# Altium PCB PCB.PcbDoc
Units mil, origin at the board's own origin, x right, y up, seen from the top; angles counter-clockwise.
Board outline 2500 x 2500 mil, 4 copper layers (Top Layer, GNDL, PWRL, Bottom Layer), stack 62.797 mil thick; 20 components, 37 nets, 134 pads, 145 vias.
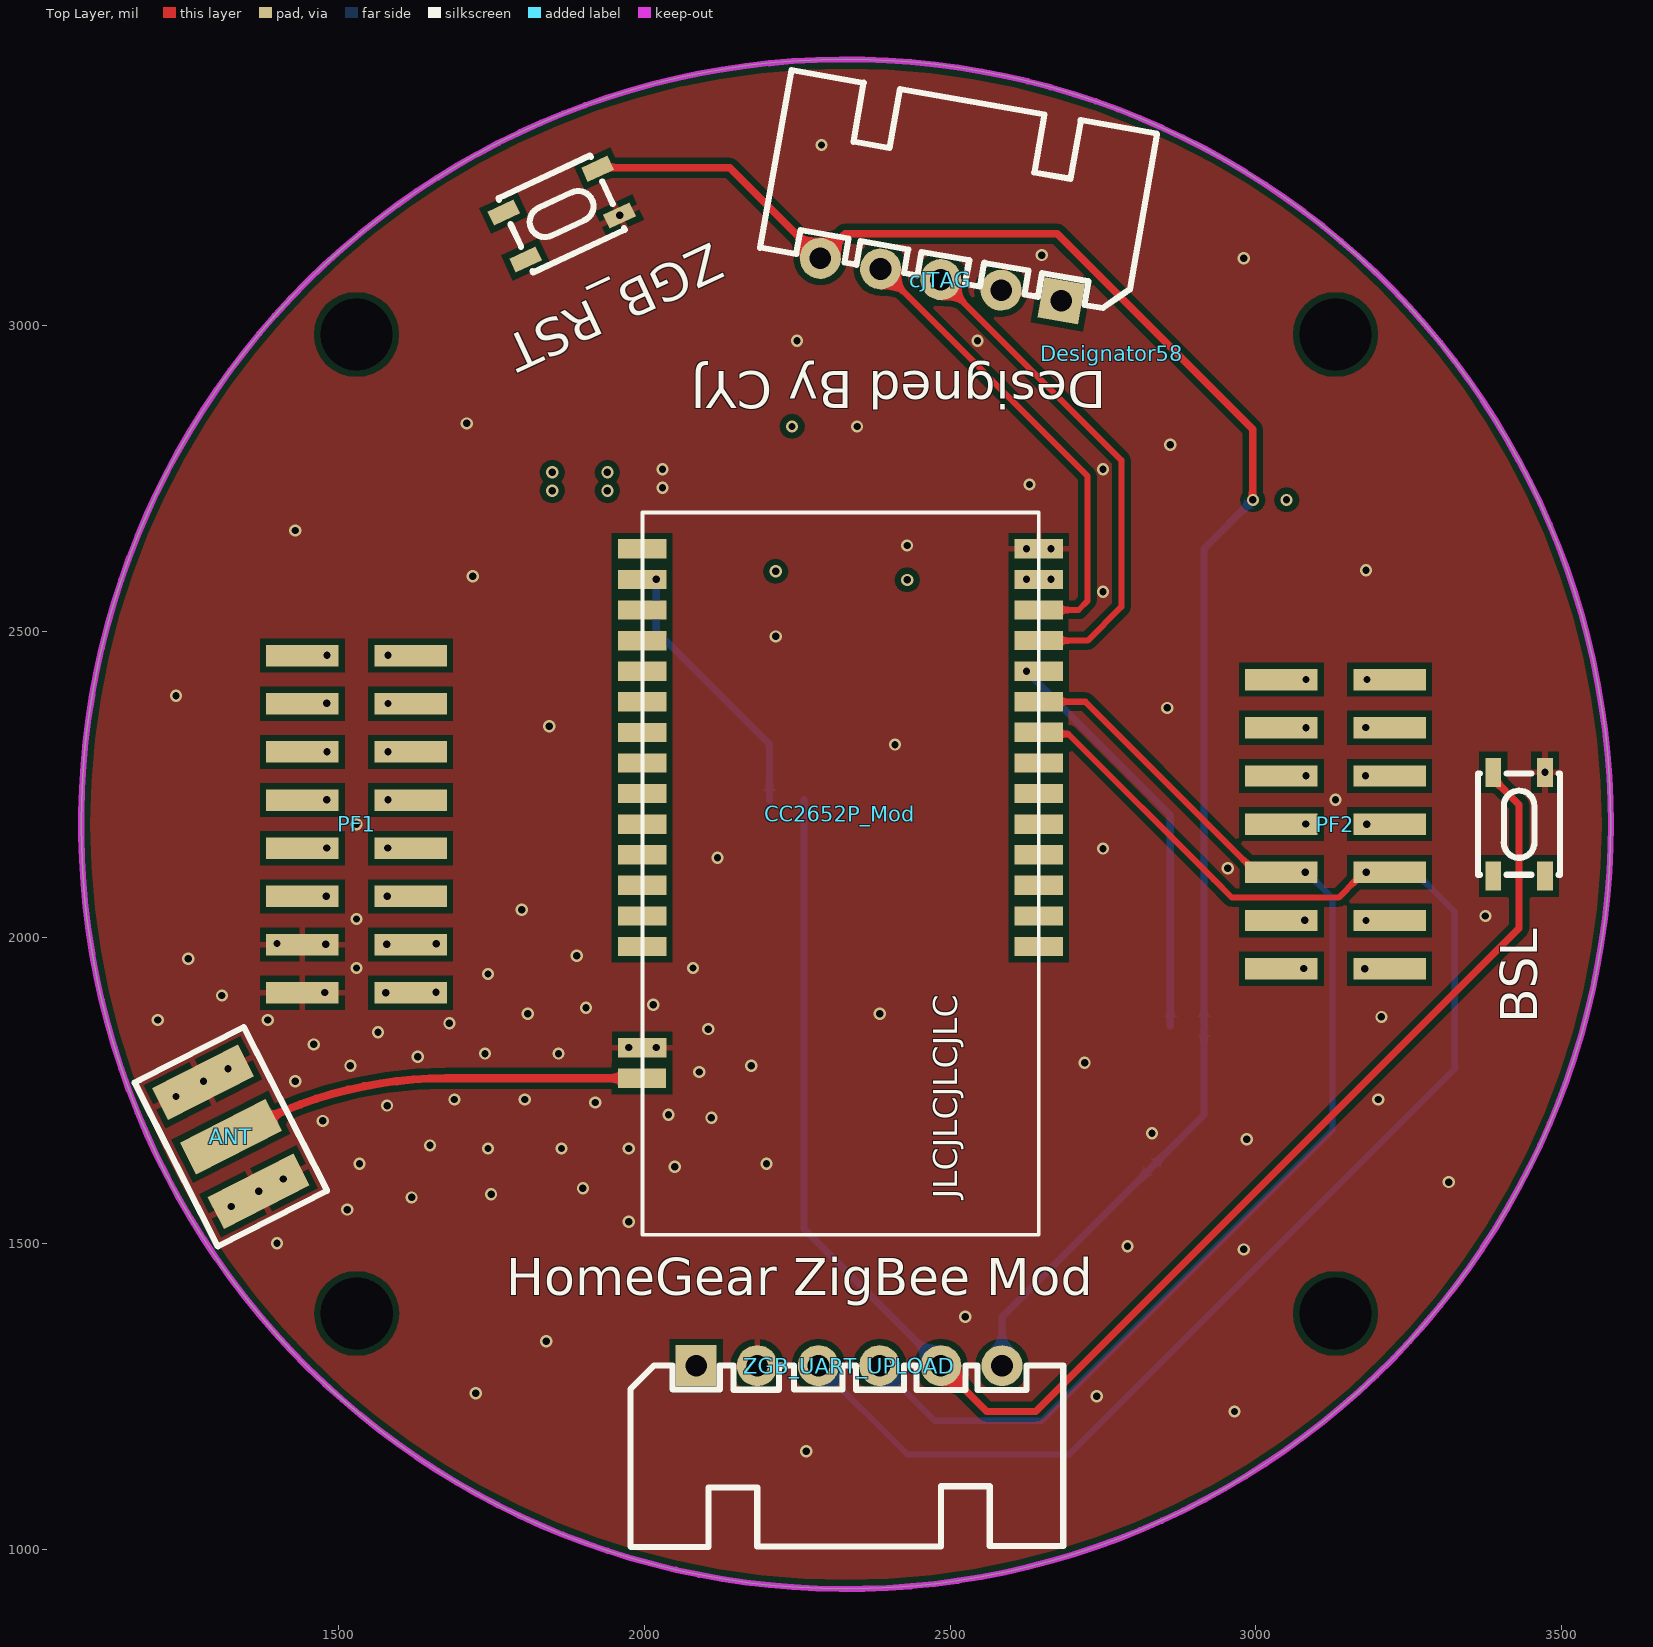
[diagram p0: Top Layer view]
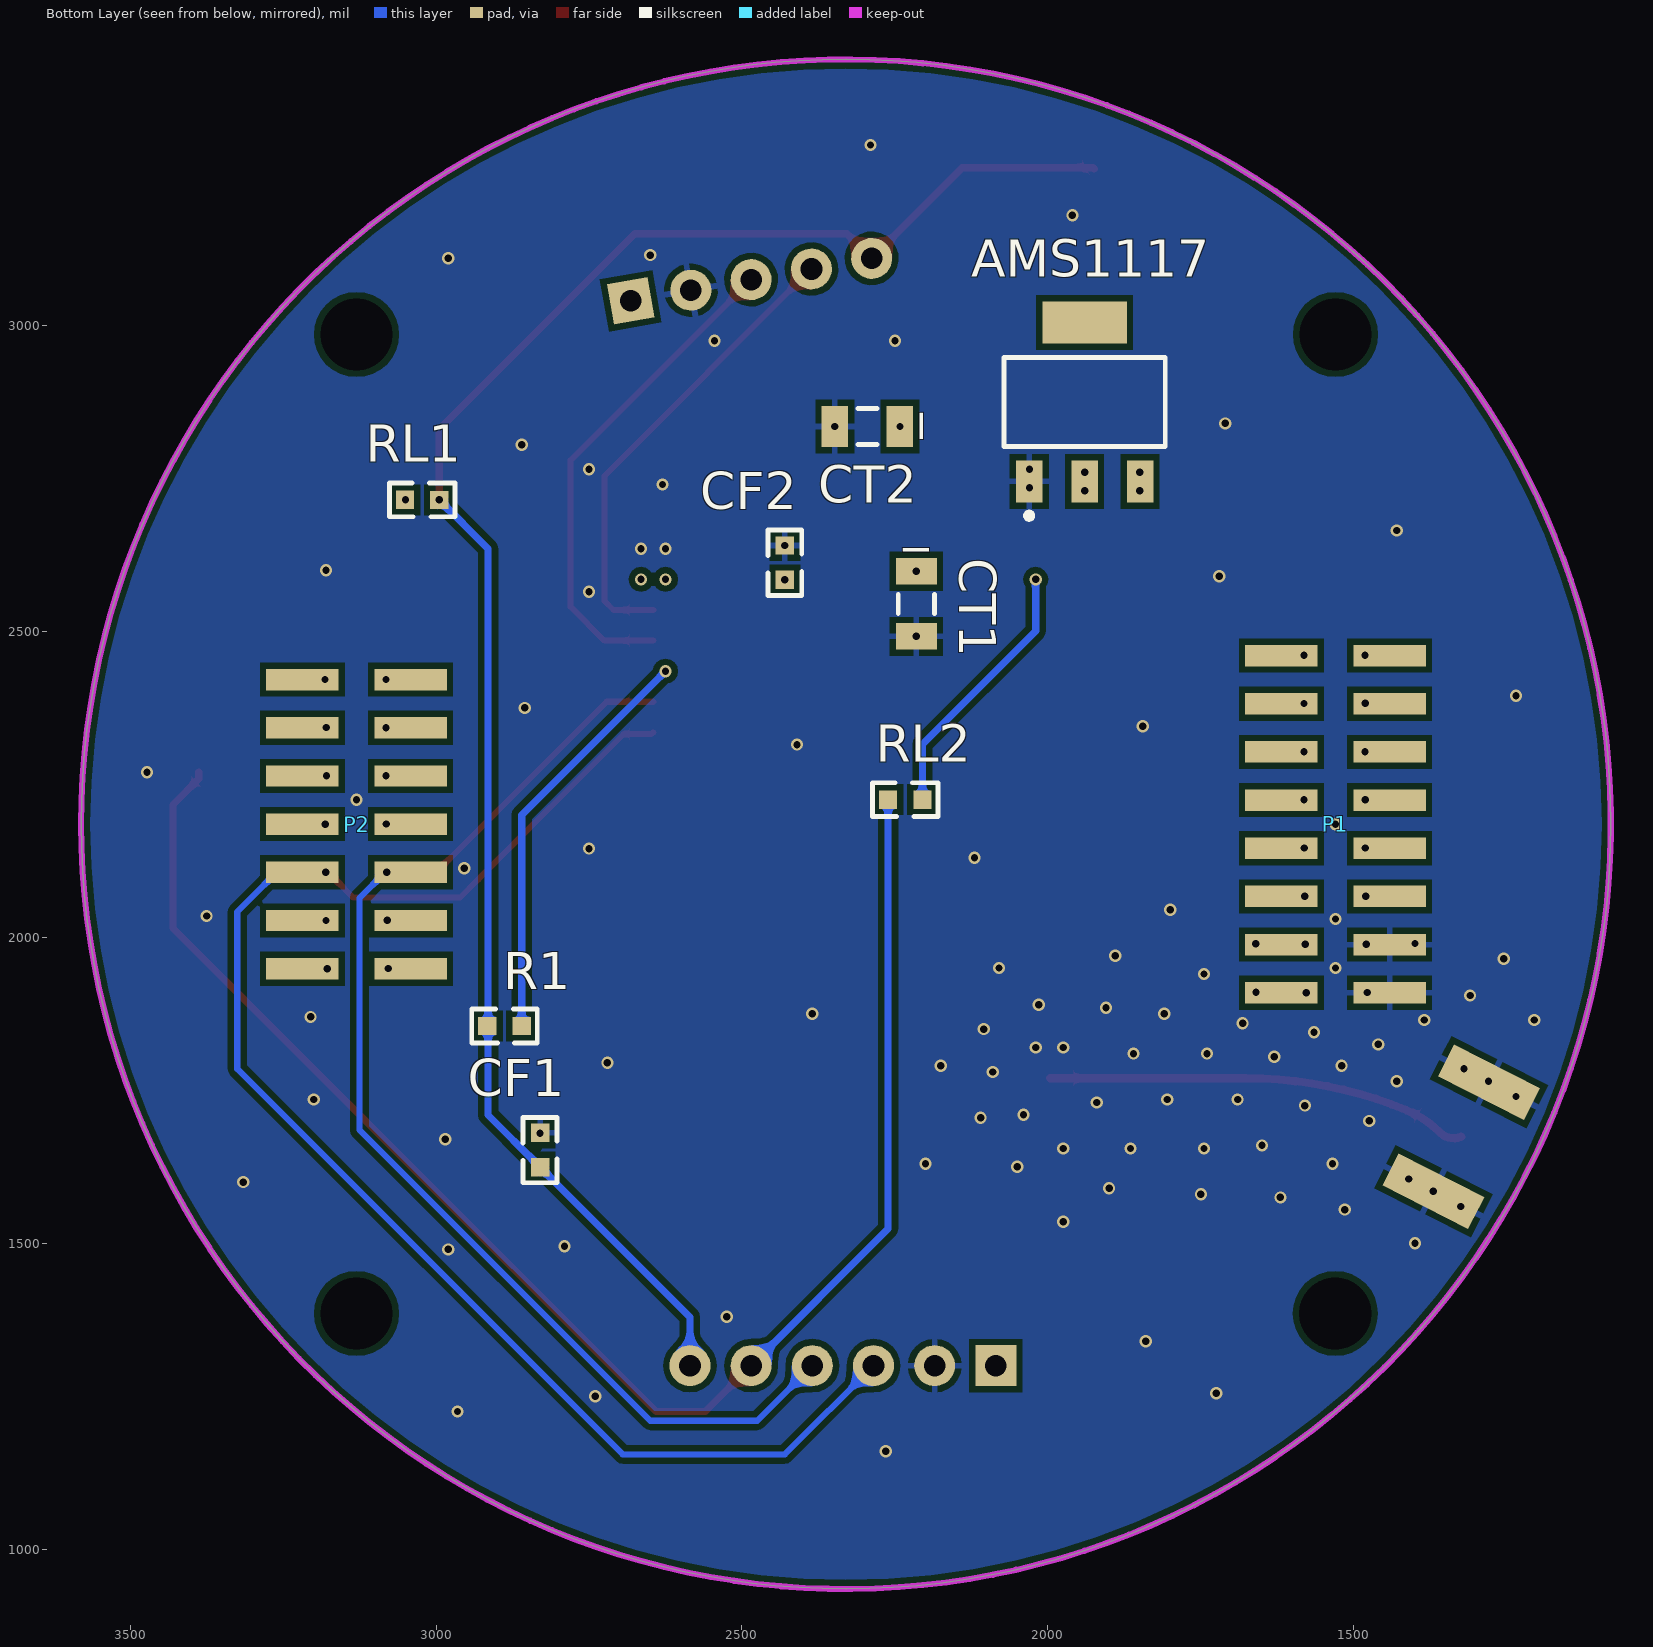
[diagram p1: Bottom Layer view, seen from below]
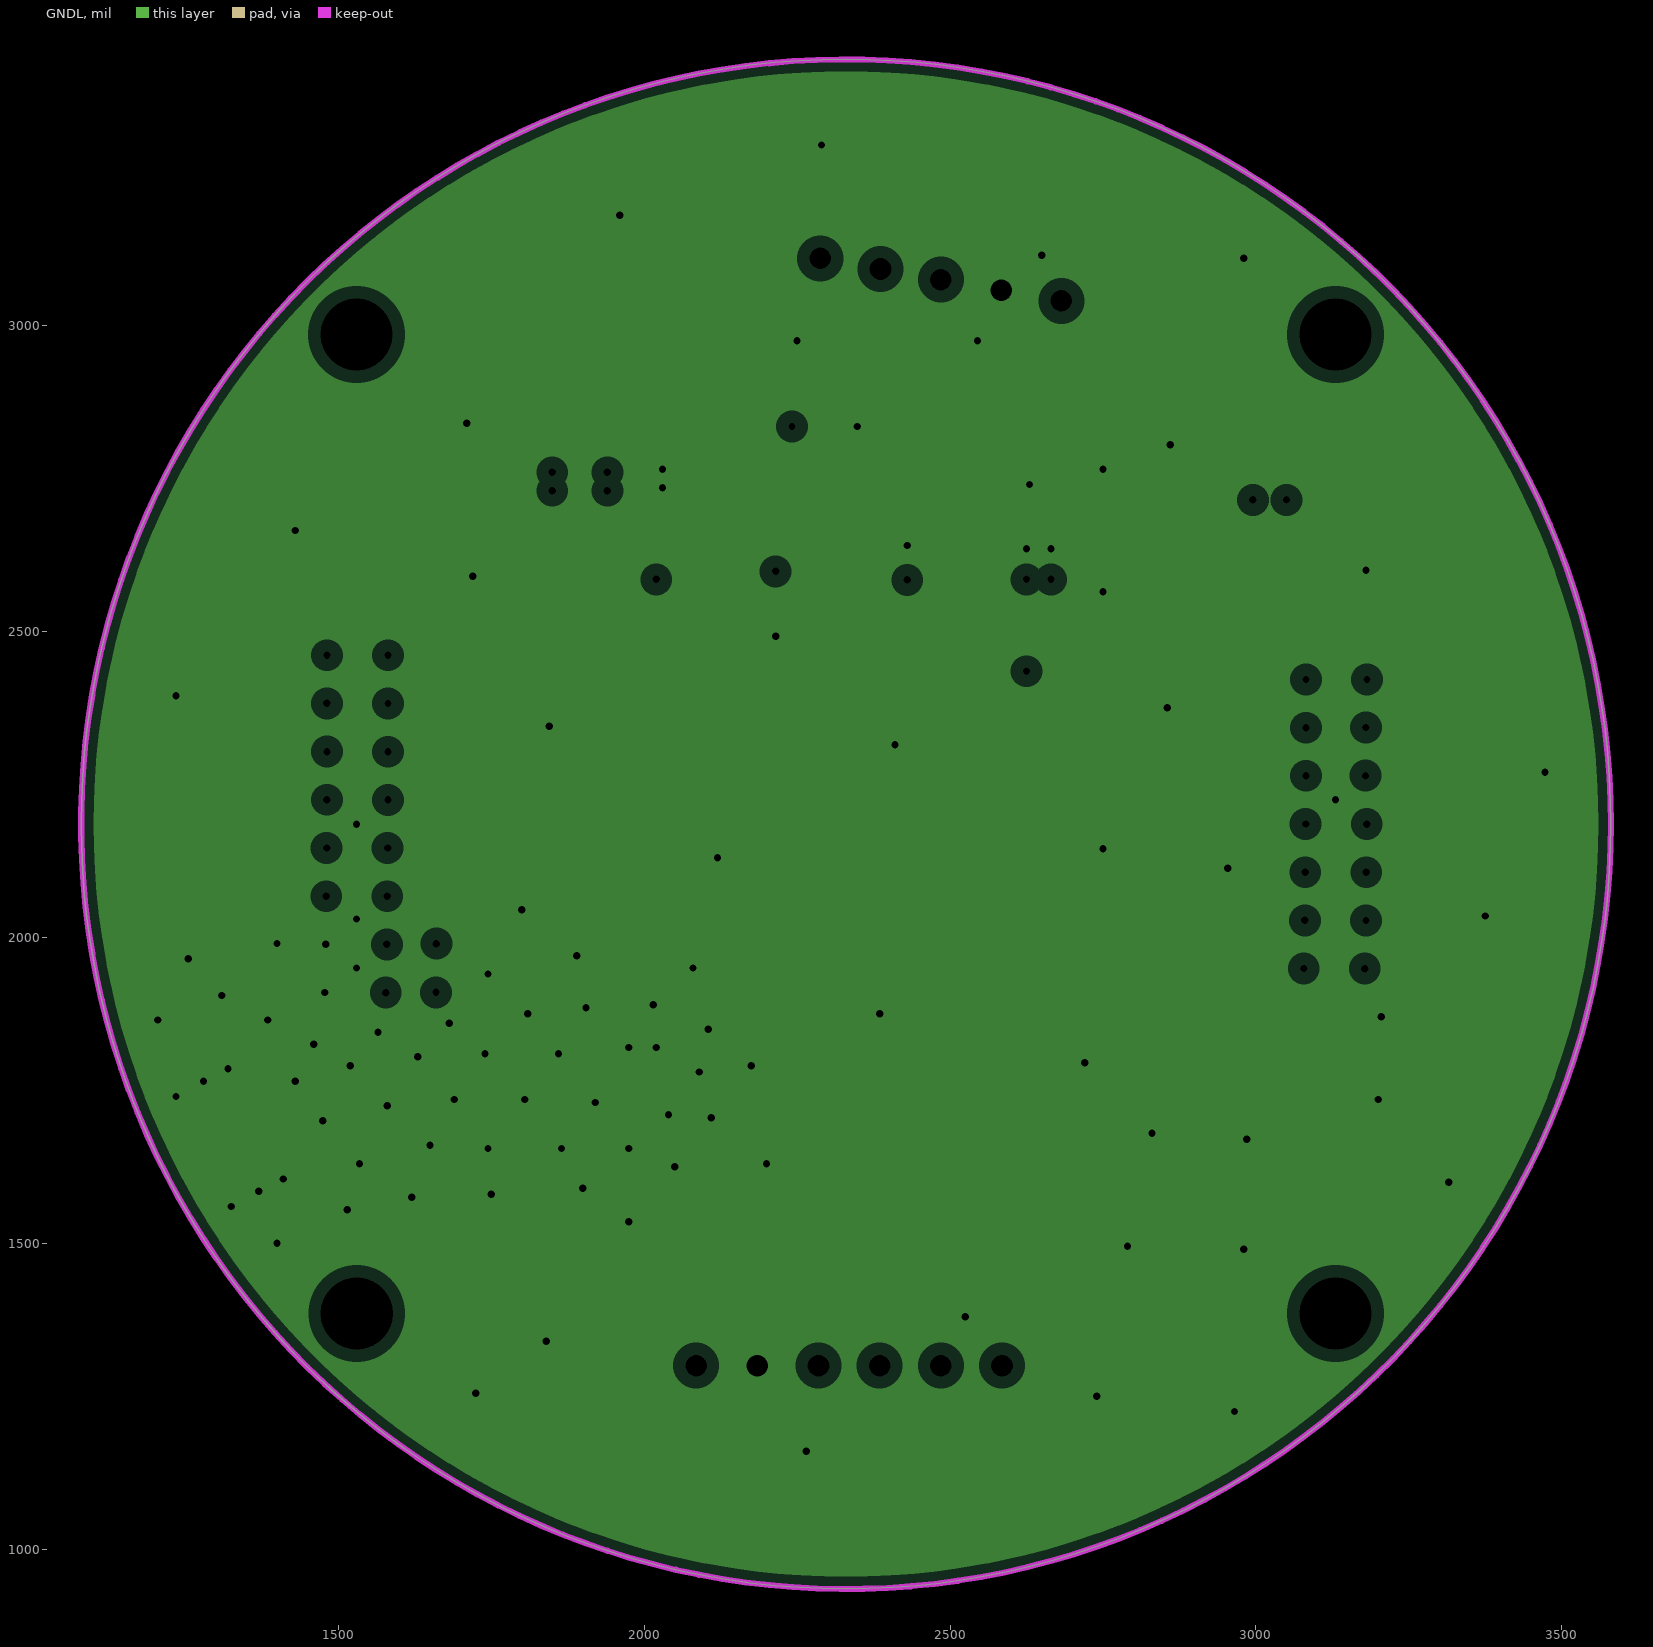
[diagram p2: GNDL, clearances drawn from the general rule]
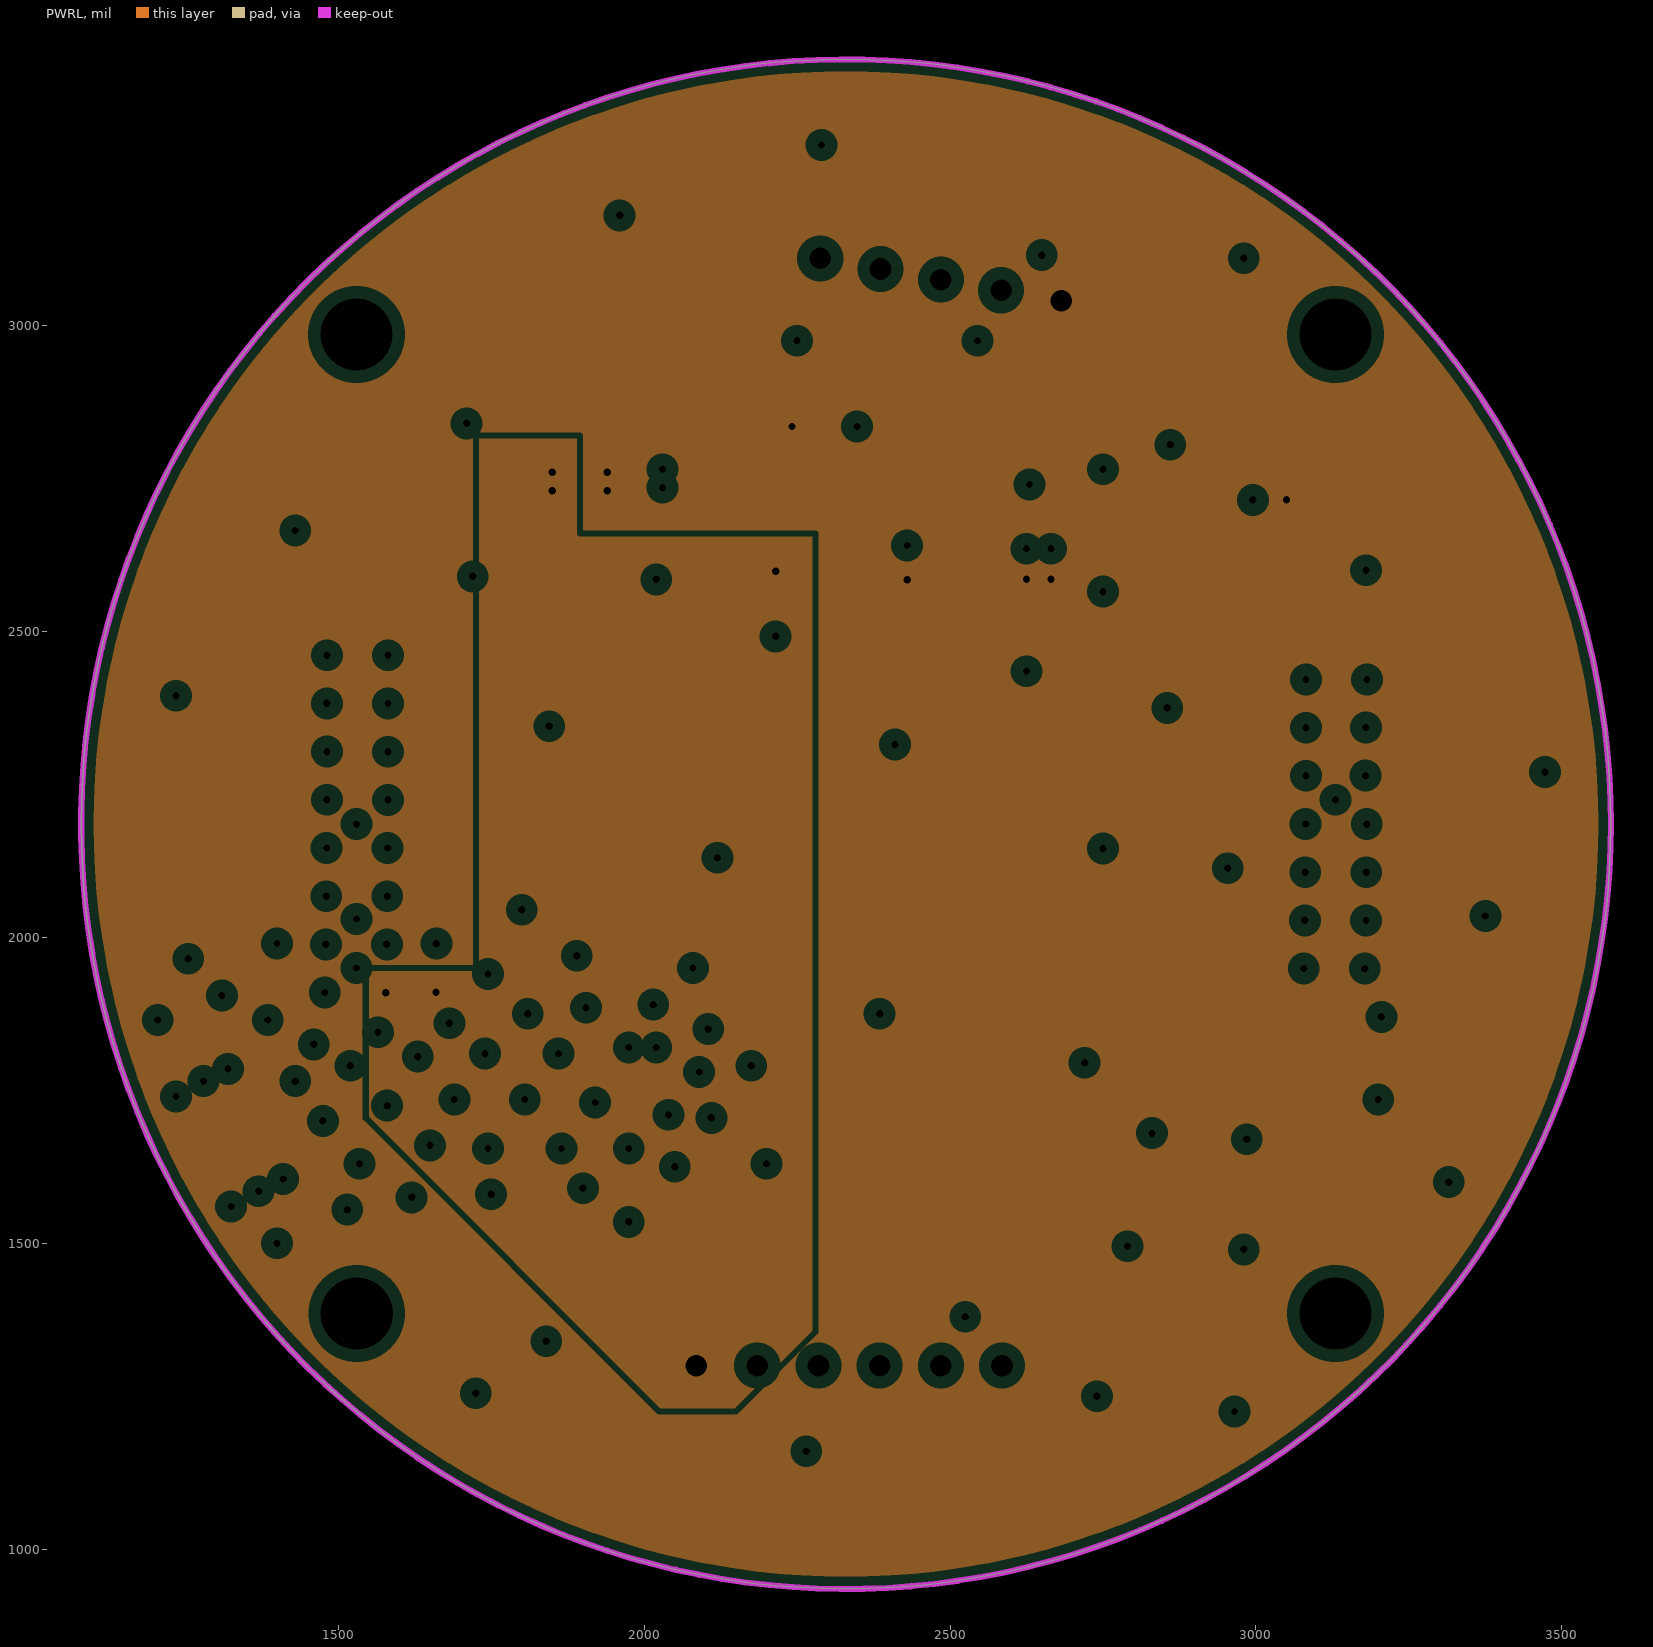
[diagram p3: PWRL, clearances drawn from the general rule]
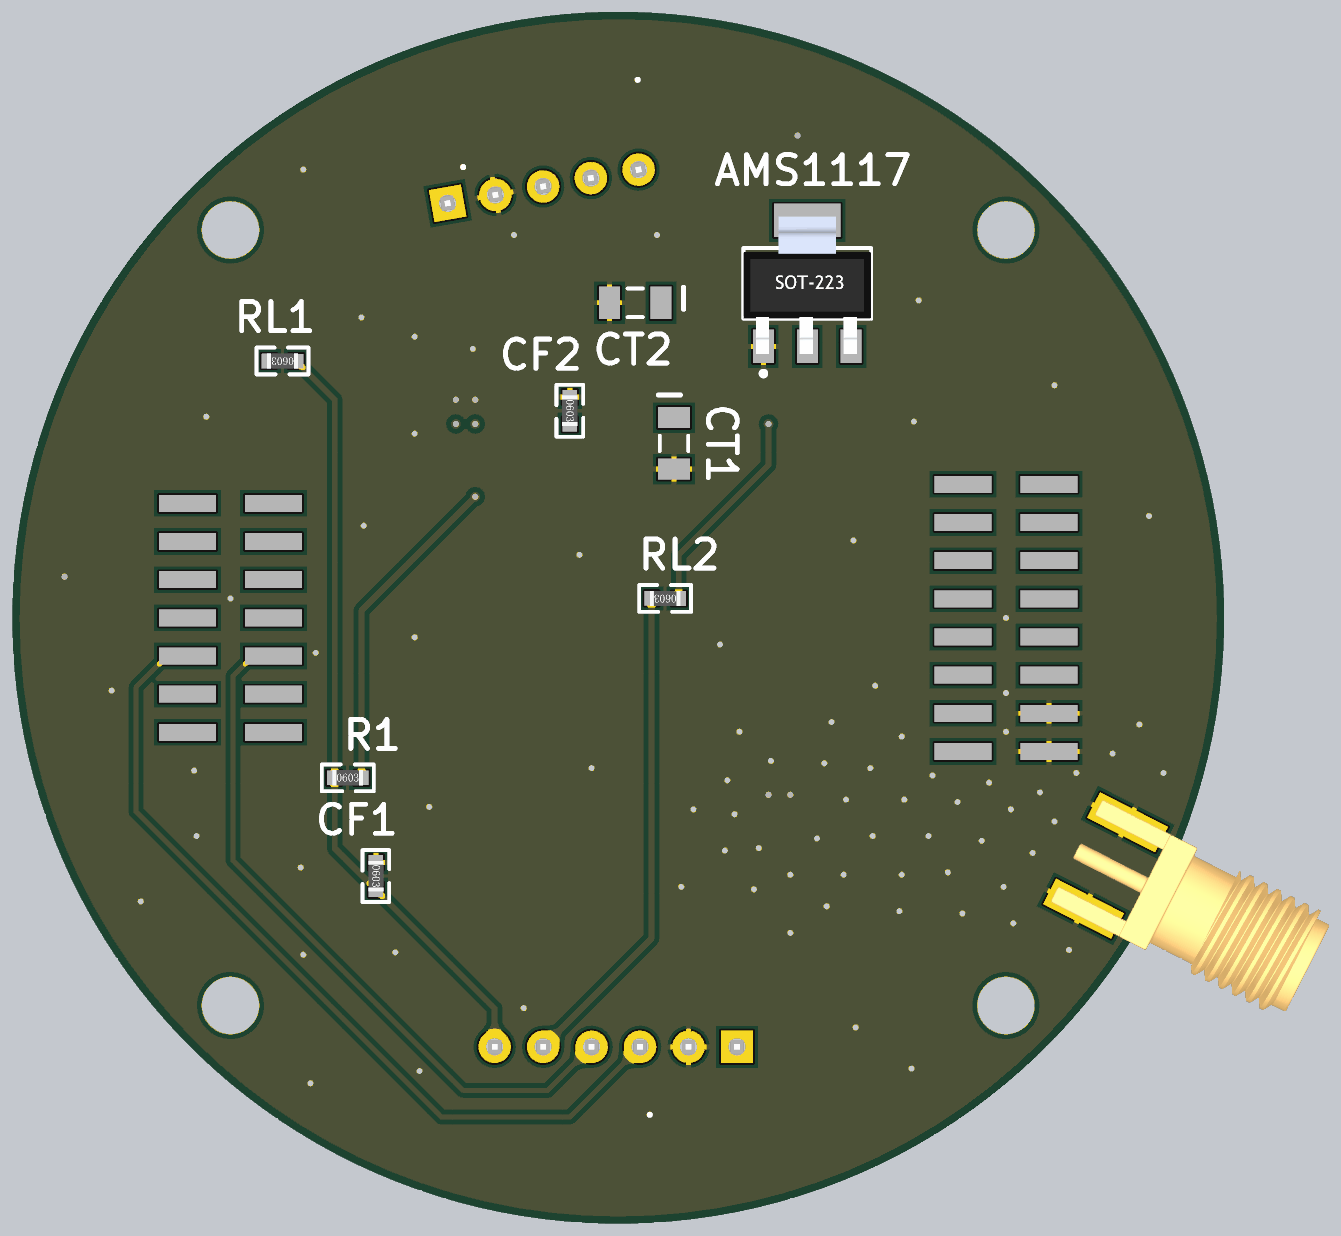
[diagram p4: 3D render of the assembled board from below, using the file's embedded part models]

## Layer stack, top to bottom
Top Solder: solder mask 0.7992, Solder Resist, Dk 3.5
Top Layer: signal copper 1.378
Dielectric 2: prepreg 7.667, PP-006, Dk 4.2
GNDL: plane copper 0.7, net GND
Dielectric 1: dielectric 43.3071, FR-4, Dk 4.8
PWRL: plane copper 0.7, net ZGB_VCC
Dielectric 3: prepreg 7.667, PP-006, Dk 4.2
Bottom Layer: signal copper 1.378
Bottom Solder: solder mask 0.7992, Solder Resist, Dk 3.5

## Board outline
1080,2185.25 ccw(c2330,2185.25) 2330,935.25 ccw(c2330,2185.25) 3580,2185.25 ccw(c2330,2185.25) 2330,3435.25 ccw(c2330,2185.25)

## Design rules (kind name [scope] priority, off if disabled: settings)
Clearance [All] p1: gap=10 ignorepadtopadclearanceinfootprint=FALSE except(0: Arc-Hole Track-Hole SMDPad-Hole THPad-Hole Via-Hole Fill-Hole Poly-Hole Region-Hole Text-Hole)
ComponentClearance ComponentClearance_1 [HasFootprint('JLC_CLI_NO')] p1: gap=0 collisioncheckmode=3 verticalgap=0 showdistances=FALSE
ComponentClearance [All] p2: gap=10 collisioncheckmode=3 verticalgap=10 showdistances=FALSE
PlaneClearance [All] p1: clearance=20
PlaneConnect [All] p1: planeconnectstyle=Direct reliefexpansion=20 reliefentries=4 reliefconductorwidth=10 reliefairgap=10
PolygonConnect [All] p1: thpad.connectstyle=Relief thpad.reliefconductorwidth=10 thpad.reliefentries=4 thpad.polygonreliefangle="90 Angle" thpad.airgapwidth=10 smdpad.connectstyle=Relief smdpad.reliefconductorwidth=10 smdpad.reliefentries=4 smdpad.polygonreliefangle="90 Angle" smdpad.airgapwidth=10 via.connectstyle=Direct via.reliefconductorwidth=10 via.reliefentries=4 via.polygonreliefangle="90 Angle" via.airgapwidth=10
RoutingVias [All] p1: holewidth=28 width=50 viastyle="Through Hole" minholewidth=28 minwidth=50 maxholewidth=28 maxwidth=50
SolderMaskExpansion [All] p1: expansion=4 istentingtop=FALSE
Width [All] p1: maxlimit=90 minlimit=10 preferedwidth=10 minimp=50.000000 maximp=50.000000 favimp=50.000000
27 further rules are at their usual default settings.

## Classes and differential pairs
component class Sheet: AMS1117 ANT BSL CC2652P_Mod CF1 CF2 cJTAG CT1 CT2 P1 P2 PF1 PF2 R1 RL1 RL2 ZGB_RST ZGB_UART_UPLOAD

## Components (designator, comment, footprint, x,y, rotation, side; value= is the part's Value field where it differs from the comment)
AMS1117 "AMS1117" SOT-223-2 1940,2875.08 r180 bottom
ANT "ANTENNA" SMA-2 1324.6,1674.1 r297 top
BSL "4.2*3.2*2.5 Button" "TSW 4.2*3.2*2.5" 3430.13,2185 r90 top
CC2652P_Mod "RF-BM-2652P2" RF-BM-2652P2 2647.99,2698.37 r180 top locked
CF1 "Cap" MY0603 2830,1650 r270 bottom value=0.1uF
CF2 "Cap" MY0603 2430,2610 r270 bottom value=0.1uF
cJTAG "cJtag_Debugger" XH2.54-WI-5P 2485,3075 r170 top
CT1 "Cap Semi" My1206 2215,2545 r270 bottom value=10uF
CT2 "Cap Semi" My1206 2295,2835 r0 bottom value=10uF
Designator58 "Comment" DesignedByCYJ 2765,2955 r180 top
P1 "Header 8X2" SMD_PIN_HDR8x2_2.0MM 1530,2185 r270 bottom
P2 "Header 7X2" SMD_PIN_HDR7x2_2.0MM 3130,2185 r270 bottom
PF1 "Header 8X2" SMD_FEM_HDR8x2_2.0MM 1530,2185 r270 top
PF2 "Header 7X2" SMD_FEM_HDR7x2_2.0MM 3130,2185 r270 top
R1 "Res2" MY0603 2885.8,1855 r180 bottom value=1k
RL1 "Res2" MY0603 3025,2715 r0 bottom value=10K
RL2 "Res2" MY0603 2235.44,2225.11 r0 bottom value=1K
ZGB_RST "4.2*3.2*2.5 Button" "TSW 4.2*3.2*2.5" 1865.24,3182.19 r25 top
ZGB_UART_UPLOAD "DebugPort" XH2.54-WI-6P 2335,1300 r0 top
? "Comment" JLC_CLI_NO 2490,1805 r90 top

## Footprints (in the part's own frame and the unit in brackets; to place one, negate y for a bottom-side part, rotate by r counter-clockwise, add the part's x,y. Pads: shape width x height; smd on the part's side, far side on the other; paste and mask are expansions set on the pad)
DesignedByCYJ [mil]
JLC_CLI_NO [mil]
MY0603 [mil]
  rect 30x30 smd: 1(-30.44,0.11) 2(25.8,0)
  silkscreen extent -56,-28 51,28, body extent -34,-16 29,16, height 18
My1206 [mm]
  rect 1.1x1.7 smd: 1(-1.35,0) 2(1.35,0)
  silkscreen extent -0.4,-0.75 0.4,0.75
RF-BM-2652P2 [mm]
  rect 2x0.8 smd: 1(0.076,18.12) 2(0.076,16.85) 3(0.076,15.58) 4(0.076,14.31) 5(0.076,13.04) 6(0.076,11.77) 7(0.076,10.5) 8(0.076,9.23) 9(0.076,7.96) 10(0.076,6.69) 11(0.076,5.42) 12(0.076,4.15) 13(0.076,2.88) 14(0.076,1.61) 15(16.538,1.611) 16(16.538,2.881) 17(16.538,4.151) 18(16.538,5.421) 19(16.538,6.691) 20(16.538,7.961) 21(16.538,9.231) 22(16.538,10.501) 23(16.538,11.771) 24(16.538,13.041) 25(16.538,14.311) 26(16.538,15.581) 27(16.538,16.851) 28(16.538,18.121) 29(16.534,22.319) 30(16.541,23.588)
  silkscreen extent 0.08,0.1 16.52,30.09
SMA-2 [mm]
  rect 1.5x4 smd: 1(0,0)
  rect 1.5x4 all layers, no hole: 2(2.54,0) 3(-2.54,0)
  silkscreen extent -3.81,-2.54 3.81,2.54, body extent -3,-11.89 3,1.71, height 3.2
SMD_FEM_HDR7x2_2.0MM [mm]
  rect 0.89x3 smd: 1(-6,-2.25) 2(-6,2.25) 3(-4,-2.25) 4(-4,2.25) 5(-2,-2.25) 6(-2,2.25) 7(0,-2.25) 8(0,2.25) 9(2,-2.25) 10(2,2.25) 11(4,-2.25) 12(4,2.25) 13(6,-2.25) 14(6,2.25)
SMD_FEM_HDR8x2_2.0MM [mm]
  rect 0.89x3 smd: 1(-7,-2.25) 2(-7,2.25) 3(-5,-2.25) 4(-5,2.25) 5(-3,-2.25) 6(-3,2.25) 7(-1,-2.25) 8(-1,2.25) 9(1,-2.25) 10(1,2.25) 11(3,-2.25) 12(3,2.25) 13(5,-2.25) 14(5,2.25) 15(7,-2.25) 16(7,2.25)
SMD_PIN_HDR7x2_2.0MM [mm]
  rect 0.89x3 smd: 1(-6,2.25) 2(-6,-2.25) 3(-4,2.25) 4(-4,-2.25) 5(-2,2.25) 6(-2,-2.25) 7(0,2.25) 8(0,-2.25) 9(2,2.25) 10(2,-2.25) 11(4,2.25) 12(4,-2.25) 13(6,2.25) 14(6,-2.25)
SMD_PIN_HDR8x2_2.0MM [mm]
  rect 0.89x3 smd: 1(-7,2.25) 2(-7,-2.25) 3(-5,2.25) 4(-5,-2.25) 5(-3,2.25) 6(-3,-2.25) 7(-1,2.25) 8(-1,-2.25) 9(1,2.25) 10(1,-2.25) 11(3,2.25) 12(3,-2.25) 13(5,2.25) 14(5,-2.25) 15(7,2.25) 16(7,-2.25)
SOT-223-2 [mm] "SOT-223/SC-73; 4 Leads; Body 6.7 x 7.3 mm, inc. leads (LxW max)"
  rect 1.1x1.75 smd: 1(-2.3,-3.3) 2(0,-3.3) 3(2.3,-3.3)
  rect 3.5x1.75 smd: 4(0,3.3)
  silkscreen extent -3.35,-4.85 3.35,1.85, body extent -3.35,-3.7 3.35,3.5, height 1.85
"TSW 4.2*3.2*2.5" [mm]
  rect 1.2x0.65 smd: 1(-2.15,1.075) 2(2.15,1.075) 3(-2.15,-1.075) 4(2.15,-1.075)
  silkscreen extent -2.1,-1.7 2.1,1.7
XH2.54-WI-5P [mm] "接插件，5P"
  rect 1.7x1.7 hole 0.9: 1(-5.08,0)
  round 1.7 hole 0.9: 2(-2.54,0) 3(0,0) 4(2.54,0) 5(5.08,0)
  silkscreen extent -7.8,-7.53 7.62,0, body extent -7.58,-7.35 7.58,0.35, height 5.73
XH2.54-WI-6P [mm] "接插件，6P"
  rect 1.7x1.7 hole 0.9: 1(-6.35,0)
  round 1.7 hole 0.9: 2(-3.81,0) 3(-1.27,0) 4(1.27,0) 5(3.81,0) 6(6.35,0)
  silkscreen extent -9.07,-7.53 8.89,0, body extent -8.85,-7.35 8.85,0.35, height 5.75

## Part data
CF1 CF2: "Capacitor", LatestRevisionDate=17-Jul-2002, LatestRevisionNote="Re-released for DXP Platform.", PackageDescription="Radial Cap, Thru-Hole; 2 Leads; 0.3 in Pin Spacing", PackageReference=RAD-0.3, Published=8-Jun-2000, Publisher="Altium Limited"
CT1 CT2: "Capacitor (Semiconductor SIM Model)", LatestRevisionDate=29-May-2009, LatestRevisionNote="IPC-7351 Footprint Added.", PackageDescription="Chip Capacitor", PackageReference=C1206, Published=8-Jun-2000, Publisher="Altium Limited"
P1 PF1: "Header, 8-Pin, Dual row", LatestRevisionDate=17-Jul-2002, LatestRevisionNote="Re-released for DXP Platform.", Publisher="Altium Limited"
P2 PF2: "Header, 7-Pin, Dual row", LatestRevisionDate=17-Jul-2002, LatestRevisionNote="Re-released for DXP Platform.", Publisher="Altium Limited"
R1 RL1 RL2: "Resistor", LatestRevisionDate=17-Jul-2002, LatestRevisionNote="Re-released for DXP Platform.", PackageDescription="Axial Device, Thru-Hole; 2 Leads; 0.4 in Pin Spacing", PackageReference=AXIAL-0.4, Published=8-Jun-2000, Publisher="Altium Limited"

## Free pads (board coordinates)
  round 0 hole 118.11: 2(1530,2985.25) 2(1530.21,1385.25) 2(3130,1385.25) 2(3130,2985.21)

## Via types
v1: diameter 20, hole 12, Top Layer to Bottom Layer, tented both sides, 81 vias
v2: diameter 18, hole 12, Top Layer to Bottom Layer, 31 vias
v3: diameter 20, hole 12, Top Layer to Bottom Layer, tented top, 15 vias
v4: diameter 20, hole 12, Top Layer to Bottom Layer, tented bottom, 10 vias
v5: diameter 20, hole 12, Top Layer to Bottom Layer, 8 vias

## Nets (pads, with @x,y where several pads share a name; then routed paths per layer and width w, separated by ;. In a path a pad name is that pad's centre, name@x,y a point inside that pad or via, vN(x,y) a via of type N, cw(c..) or ccw(c..) an arc to the next point about the centre after c; other vN are vias at no path point)
+3.3: P1.14 PF1.14
  other v2: 1579.67,1988.47
  other v5: 1660.52,1989.74
+5: AMS1117.3 CT1.1 P1.16 PF1.16 ZGB_UART_UPLOAD.1
  other v2: 1577.81,1909.71
  other v3: 2215,2598.15 1850,2730 1850,2760
  other v5: 1660,1910
ANT: ANT.1 CC2652P_Mod.30 | length 693.4
  Top Layer w13.46: ANT.1 ccw(c1336.75,1703.43) 1359.11,1680.9 1359.26,1681.05 cw(c1478.5,1561.7) 1413.74,1717.48 cw(c1675.73,1086.32) 1675.73,1769.7 1675.8,1769.7 CC2652P_Mod.30
BSL: BSL.2 RL2.2 ZGB_UART_UPLOAD.5 | length 2593.5
  Top Layer w12: ZGB_UART_UPLOAD.5 2560,1225 2640,1225 3430,2015 3430,2216.87 3387.8,2259.07 BSL.2@3387.8,2269.9
  Bottom Layer w12: RL2.2 2261.24,1523.76 ZGB_UART_UPLOAD.5
CS1: P2.7 PF2.7
  other v2: 3081.22,2185.2
GND: AMS1117.1 ANT.2 ANT.3 BSL.4 CC2652P_Mod.14 CC2652P_Mod.29 CF1.1 CF2.1 cJTAG.2 CT1.2 CT2.2 P1.13 P1.15 PF1.13 PF1.15 ZGB_RST.4 ZGB_UART_UPLOAD.2
  other v1: 2265,1160 2965,1225 2740,1250 1725,1255 1840,1340 2525,1380 2980,1490 2790,1495 1400,1500 1975,1535 1515,1555 1620,1575 1750,1580 1900,1590 3315,1600 2050,1625 1535,1630 2200,1630 1745,1655 1865,1655 1975,1655 1650,1660 2985,1670 1475,1700 2110,1705 2040,1710 1580,1725 1920,1730 1690,1735 1805,1735 3200,1735 1430,1765 2090,1780 1520,1790 2175,1790 2720,1795 1630,1805 1740,1810 1860,1810 1460,1825 1565,1845 2105,1850 1681.81,1859.73 1205,1865 1385,1865 3205,1870 1810,1875 2385,1875 1905,1885 2015,1890 1310,1905 1745,1940 1530,1950 2080,1950 1255,1965 1890,1970 1530,2030 3375,2035 1800,2045 2954.01,2112.88 2120,2130 2750,2145 1530,2185 3130,2225 2410,2315 1845,2345 2855,2375 1235,2395 2750,2565 1720,2590 3180,2600 1430,2665 2630,2740 2750,2765 2860,2805 1710,2840 2250,2975 2545,2975 2980,3110 2650,3115 2290,3295
  other v2: 1478.02,1909.8 1479.89,1988.56 1400,1990
  other v3: 2830,1680 2215,2491.85 2429.89,2640.44 2030,2735 2030,2765 2348.15,2835
  other v4: 1975,1820 2020,1820 3472.36,2269.99 2625,2635 2665,2635 1960,3180
  other v5: 1325,1560 1370,1585 1410,1605 1235,1740 1280,1765 1320,1785
IO0: P2.11 PF2.11
  other v2: 3080.03,2027.73
IO2: P2.14 PF2.14
  other v2: 3177.95,1948.88
IO4: P2.12 PF2.12
  other v2: 3179.82,2027.64
IO12: P1.11 PF1.11
  other v2: 1480.44,2067.25
IO13: P1.12 PF1.12
  other v2: 1580.22,2067.16
IO14: P1.10 PF1.10
  other v2: 1580.86,2145.94
IO15: P2.13 PF2.13
  other v2: 3078.17,1948.97
IO25: P1.7 PF1.7
  other v2: 1481.63,2224.81
IO26: P1.8 PF1.8
  other v2: 1581.41,2224.72
IO27: P1.9 PF1.9
  other v2: 1481.08,2146.03
IO32: P1.5 PF1.5
  other v2: 1481.7,2303.54
IO33: P1.6 PF1.6
  other v2: 1581.48,2303.44
IO34: P1.3 PF1.3
  other v2: 1481.62,2382.33
IO35: P1.4 PF1.4
  other v2: 1581.4,2382.24
MISO: P2.5 PF2.5
  other v2: 3081.77,2263.98
MOSI: P2.2 PF2.2
  other v2: 3181.55,2421.41
NetCC2652P_Mod_10: CC2652P_Mod.10 R1.2 | length 677.3
  Bottom Layer w12: v4(2625,2435) 2860,2200 R1.2
NetCC2652P_Mod_16: CC2652P_Mod.16 RL2.1 | length 436.6
  Bottom Layer w12: v4(2020,2585) 2020,2500.57 2205,2315.57 RL2.1
RXD0: P2.3 PF2.3
  other v2: 3081.84,2342.7
RXD1: CC2652P_Mod.9 P2.9 PF2.9 ZGB_UART_UPLOAD.4 | length 1966.3
  Top Layer w10: CC2652P_Mod.9 2721.39,2385 2999.88,2106.51 PF2.9@3041.42,2106.51
  Bottom Layer w10: ZGB_UART_UPLOAD.4 2475,1210 2650,1210 3125,1685 3125,2064.46 3082.95,2106.51 P2.9@3041.42,2106.51
  other v2: 3080.58,2106.42
SCK: P2.8 PF2.8
  other v2: 3181.01,2185.11
SCL: P2.1 PF2.1
  other v2: 3081.77,2421.5
SDA: P2.6 PF2.6
  other v2: 3179.03,2264.27
SENSOR_VN: P1.2 PF1.2
  other v2: 1581.56,2461.04
SENSOR_VP: P1.1 PF1.1
  other v2: 1481.77,2461.13
TCK: CC2652P_Mod.12 cJTAG.4 | length 768.8
  Top Layer w10: cJTAG.4 2725,2753.88 2725,2550 2710,2535 CC2652P_Mod.12
TMS: CC2652P_Mod.11 cJTAG.3 | length 815
  Top Layer w10: cJTAG.3 2780,2780 2780,2540 2725,2485 CC2652P_Mod.11
TXD0: P2.4 PF2.4
  other v2: 3179.71,2342.85
TXD1: CC2652P_Mod.8 P2.10 PF2.10 ZGB_UART_UPLOAD.3 | length 2453.9
  Top Layer w10: CC2652P_Mod.8 2647.65,2332.35 2693.51,2332.35 2930.86,2095 2960.86,2065 3135,2065 3163.99,2093.99 3164.53,2093.99 3176.51,2105.97 3176.51,2106.51 PF2.10@3218.58,2106.51
  Bottom Layer w10: ZGB_UART_UPLOAD.3 2430,1155 2695,1155 3325,1785 3325,2041.63 3260.12,2106.51 P2.10@3218.58,2106.51
  other v2: 3180.37,2106.33
ZGB_RST: CF1.2 cJTAG.5 R1.1 RL1.1 ZGB_RST.2 ZGB_UART_UPLOAD.6 | length 2978
  Top Layer w12: ZGB_RST.2 1925.57,3257.82 2139.95,3257.82 cJTAG.5 2328.31,3150 2675,3150 2994.56,2830.44 v3@2994.56,2715.11
  Bottom Layer w12: ZGB_UART_UPLOAD.6 2585,1379.2 CF1.2 ; CF1.2@2833.03,1627.63 2915,1709.6 2915,1853.87 R1.1 2915,1856.35 2915,2635 v3(2995,2715)
ZGB_VCC: AMS1117.2 CC2652P_Mod.13 CF2.2 cJTAG.1 CT2.1 RL1.2
  other v3: 2430,2584.2 3050,2715 1940,2730 1940,2760 2241.85,2835
  other v4: 2625,2585 2665,2585
pads on no net: AMS1117.4 BSL.1 BSL.3 CC2652P_Mod.1 CC2652P_Mod.2 CC2652P_Mod.3 CC2652P_Mod.4 CC2652P_Mod.5 CC2652P_Mod.6 CC2652P_Mod.7 CC2652P_Mod.15 CC2652P_Mod.17 CC2652P_Mod.18 CC2652P_Mod.19 CC2652P_Mod.20 CC2652P_Mod.21 CC2652P_Mod.22 CC2652P_Mod.23 CC2652P_Mod.24 CC2652P_Mod.25 CC2652P_Mod.26 CC2652P_Mod.27 CC2652P_Mod.28 ZGB_RST.1 ZGB_RST.3

## Polygon pours and split planes (outlines as drawn)
GND on Bottom Layer "NONET_L-01_P-001" (solid, remove dead copper, pour order 0): 1040,3525 3655,3525 3655,950 3565,860 965,860
GND on Top Layer "NONET_L-01_P-001" (solid, remove dead copper, pour order 1): 1046.73,3531.73 3661.73,3531.73 3661.73,956.73 3571.73,866.73 971.73,866.73
GND on GNDL (split plane): 257 vertices, not listed, extent 1100.01,955.26 3559.99,3415.24
+5 on PWRL (split plane): 1889.9,2660 1890.29,2658.05 1891.4,2656.4 1893.05,2655.29 1895,2654.9 2274.9,2654.9 2274.9,2530 2274.9,1357.11 2147.89,1230.1 2027.11,1230.1 1550.1,1707.11 1550.1,1870 1550.1,1885 1550.1,1944.9 1725,1944.9 1726.95,1945.29 1728.6,1946.4 1729.71,1948.05 1730.1,1950 1730.1,2814.9 1889.9,2814.9
ZGB_VCC on PWRL (split plane): 257 vertices, not listed, extent 1100.01,955.26 3559.99,3415.24

## Keep-outs
Keep-Out Layer:
  circle w10: c2330,2185 r1250

## Other copper
PWRL (plane layer: these items are gaps in the copper):
  lines w10: 1545,1705 2025,1225 2135,1225 2150,1225 2280,1355 2280,2530 2280,2660 1895,2660 1895,2820 1725,2820 1725,1950 1545,1950 1545,1885 1545,1870 1545,1705

## Silkscreen, mask and mechanical layers (free items; w line width, h text height)
Top Overlay:
  text "HomeGear ZigBee Mod" at 1775,1414.99 h60
Bottom Overlay:
  text "_" at 2190,2815 h60 r90
  text "_" at 2195,2650 h60

## Text inside footprints (layer, text, board x,y; h text height)
Designator58: Top Overlay "Designed By CYJ" at 2755,2925.01 h60 r180
?: Top Overlay "JLCJLCJLCJLC" at 2512.13,1572.87 h39.37 r90